# Allegro board PROIECT1DCE1.brd
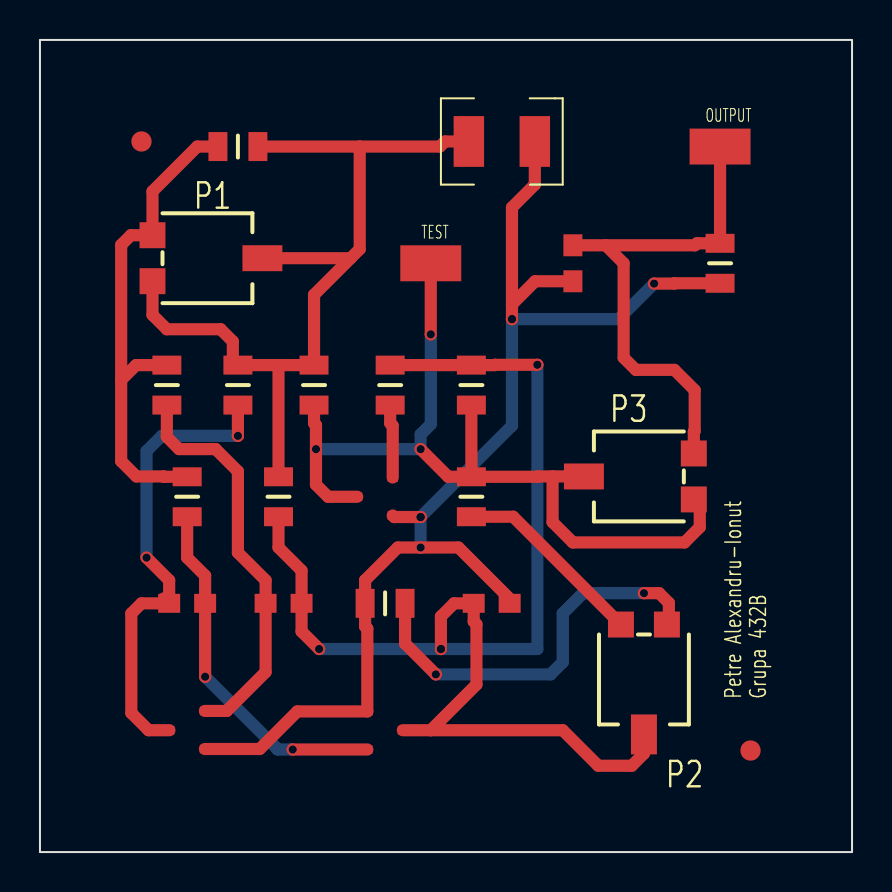
[diagram p0: board, top side]
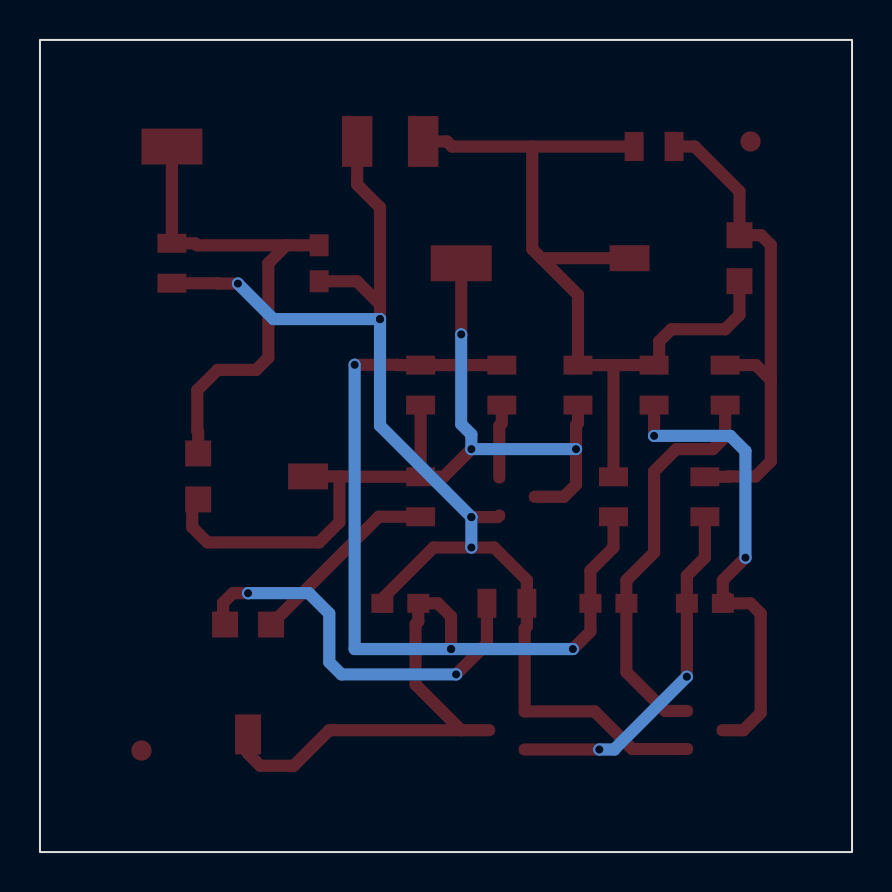
[diagram p1: board, bottom side, seen from below]

Outline 40.64 x 40.64 mm; copper layers: TOP, BOTTOM. Coordinates in mm from the lower left corner of the outline.
Outline path: rectangle 0,0 40.64,40.64

## Placement (name value [footprint] x y rotation side)
C1  470n  [CAPC2008X126N_0805]  7.37 12.45 0 top
C2  470n  [CAPC2008X126N_0805]  12.19 12.45 0 top
C3  1n  [CAPC2008X126N_0805]  22.61 12.45 180 top
C4  10n  [CAPC2008X126N_0805]  26.67 29.46 90 top
J1  CON1  [SMD_PAD_3-05_1-80]  34.04 35.31 0 top
J2  CON1  [SMD_PAD_3-05_1-80]  19.56 29.46 0 top
NOREF  -  [unnamed]  35.56 5.08 0 top
NOREF#2  -  [unnamed]  5.08 35.56 0 top
P1  50k  [3314G-1]  8.38 29.72 90 top
P2  100k  [3314G-1]  30.23 8.64 0 top
P3  500k  [3314G-1]  29.97 18.8 270 top
Q1  QMJD31C  [SOT23]  7.37 6.1 180 top
Q2  QMJD31C  [SOT23]  17.27 6.1 0 top
Q3  QMJD31C  [SOT23]  16.76 17.78 180 top
R1  2.2k  [RES2012X50N_0805]  9.91 23.37 90 top
R2  9.1k  [RES2012X50N_0805]  6.35 23.37 90 top
R3  9.1k  [RES2012X50N_0805]  7.37 17.78 90 top
R4  2.2k  [RES2012X50N_0805]  11.94 17.78 90 top
R5  47k  [RES2012X50N_0805]  9.91 35.31 0 top
R6  47k  [RES2012X50N_0805]  21.59 23.37 270 top
R7  9.1k  [RES2012X50N_0805]  17.53 23.37 270 top
R8  9.1k  [RES2012X50N_0805]  13.72 23.37 90 top
R9  100k  [RES2012X50N_0805]  21.59 17.78 90 top
R10  10k  [RES2012X50N_0805]  17.27 12.45 0 top
RL  1k  [RES2012X50N_0805]  34.04 29.46 90 top
V1  CON2  [1210RF_WV_12D]  23.11 35.56 0 top

## Library data of the parts
C1-C4 = C
J1 J2 = CON1
P1-P3 = POT
Q1-Q3 = QMJD31C
R1-R10 RL = R
V1 = CON2

## Footprints (pads in the part's own frame, mm; a bottom-side part is the same pattern mirrored in y, then rotated)
1210RF_WV_12D
  rect 1.524x2.54 smd: 1(-1.651,0) 2(1.651,0)
3314G-1
  rect 1.3x1.3 smd: 1(-1.15,2.75) 3(1.15,2.75)
  rect 1.3x2 smd: 2(0,-2.75)
CAPC2008X126N_0805
  rect 1.1x0.95 smd: 1(-0.9,0) 2(0.9,0)
RES2012X50N_0805
  rect 0.95x1.45 smd: 1(-1,0) 2(1,0)
SMD_PAD_3-05_1-80
  rect 3.05x1.8 smd: 1(0,0)
SOT23
  rect 0.508x0.432 smd: 1(-0.889,0.94) 2(-0.889,-0.965) 3(0.889,0)
unnamed
  round 1.016 smd: (0,0)

## Nets
0: C3.1 C4.1 Q1.1(E) Q2.1(E) Q3.1(E) R10.1 RL.1 V1.2
N35206: C1.2 Q2.2(B) R3.1
N35240: C2.1 Q1.2(B) R2.1
N35258: C1.1 Q1.3(C) R1.1
N35272: C2.2 C3.2 P2.2(T) Q2.3(C) R4.1 R6.1 R7.1
N35294: P1.1 P1.2(T) R1.2 R4.2 R5.2 R8.2 V1.1
N35362: P1.3(2) R2.2 R3.2 R5.1
N35472: J2.1 P3.2(T) P3.3(2) Q3.3(C) R6.2 R8.1 R9.2
N35578: P2.3(2) R10.2
N35640: P2.1 R9.1
N35692: C4.2 J1.1 P3.1 RL.2
N35976: Q3.2(B) R7.2

## Via types
v1: diameter 0.61, hole 0.406, TOP to BOTTOM, 19 vias

## Routing (per net, layer and track width the routed paths; a pad name or vN(x,y) marks a point on that pad's centre or on a via; arc(x,y) is an arc through that point)
0: length 63.6
  TOP w0.61: V1.2 24.77,33.4 23.62,32.26 23.62,27.41 ; 23.62,27.41 v1(23.62,26.67) ; 23.62,27.41 24.78,28.56 C4.1 ; Q3.1 17.73,16.76 v1(19.05,16.76) ; v1(30.73,28.45) 31.73,28.45 31.75,28.46 RL.1 ; C3.1 23.62,12.56 20.94,15.24 v1(19.05,15.24) 17.91,15.24 16.27,13.6 R10.1 16.27,11.29 16.38,11.18 Q2.1 12.88,7.04 11,5.16 8.26,5.16
  BOTTOM w0.61: v1(19.05,15.24) v1(19.05,16.76) 23.62,21.34 v1(23.62,26.67) 28.96,26.67 v1(30.73,28.45)
N35206: length 18
  TOP w0.61: R3.1 7.37,14.73 8.27,13.83 C1.2 v1(8.27,8.77) ; Q2.2 v1(12.65,5.13)
  BOTTOM w0.61: v1(8.27,8.77) 11.89,5.15 11.89,5.13 v1(12.65,5.13)
N35240: length 20.3
  TOP w0.61: R2.1 6.35,20.78 6.96,20.17 8.79,20.17 9.91,19.05 9.91,14.99 11.29,13.6 C2.1 11.29,9.01 9.35,7.06 8.26,7.06
N35258: length 24.2
  TOP w0.61: C1.1 6.21,12.7 ; C1.1 5.08,12.45 4.57,11.94 4.57,6.96 5.44,6.1 Q1.3 ; C1.1 6.47,13.6 v1(5.33,14.73) ; v1(9.91,20.83) R1.1
  BOTTOM w0.61: v1(5.33,14.73) 5.33,20.07 6.1,20.83 v1(9.91,20.83)
N35272: length 64.9
  TOP w0.61: 19.56,6.1 26.16,6.1 27.94,4.32 29.62,4.32 30.23,4.93 P2.2 ; 19.56,6.1 21.84,8.38 21.84,11.4 21.71,11.54 C3.2 20.72,12.45 20.07,11.79 v1(20.07,10.16) ; 19.56,6.1 Q2.3 ; R7.1 R6.1 22.75,24.37 22.76,24.38 v1(24.89,24.38) ; v1(13.97,10.16) 13.09,11.04 C2.2 13.09,14.09 11.94,15.24 R4.1
  BOTTOM w0.61: v1(13.97,10.16) v1(20.07,10.16) 24.89,10.16 v1(24.89,24.38)
N35294: length 43.9
  TOP w0.61: V1.1 20.27,35.56 20.02,35.31 16,35.31 ; R4.2 11.94,24.37 ; 11.94,24.37 R8.2 13.72,27.89 15.55,29.72 ; 11.94,24.37 R1.2 9.65,24.62 9.65,25.55 9.04,26.16 6.35,26.16 5.63,26.88 P1.1 ; 16,35.31 16,30.17 15.55,29.72 ; 16,35.31 R5.2 ; 15.55,29.72 P1.2
N35362: length 25.2
  TOP w0.61: R5.1 7.87,35.31 5.63,33.06 P1.3 4.55,30.87 4.06,30.38 4.06,23.62 ; 4.06,23.62 4.06,19.56 4.83,18.8 6.19,18.8 6.21,18.78 R3.2 ; 4.06,23.62 4.81,24.37 R2.2
N35472: length 45.3
  TOP w0.61: 25.65,18.8 25.65,16.51 26.67,15.49 32.26,15.49 33.02,16.26 33.02,17.35 P3.3 ; 25.65,18.8 P3.2 ; 25.65,18.8 24.92,18.8 24.91,18.78 R9.2 ; J2.1 v1(19.56,25.91) ; R9.2 R6.2 ; R9.2 20.43,18.78 v1(19.05,20.16) ; Q3.3 14.42,17.78 13.81,18.39 v1(13.81,20.16) 13.81,21.36 13.72,21.46 R8.1
  BOTTOM w0.61: v1(19.56,25.91) 19.56,21.41 19.05,20.9 v1(19.05,20.16) v1(13.81,20.16)
N35578: length 20.3
  TOP w0.61: R10.2 18.27,10.43 v1(19.81,8.89) ; P2.3 31.47,11.48 31.47,12.47 30.99,12.95 v1(30.23,12.95)
  BOTTOM w0.61: v1(30.23,12.95) 27.18,12.95 26.16,11.94 26.16,9.5 25.55,8.89 v1(19.81,8.89)
N35640: length 9.7
  TOP w0.61: R9.1 23.68,16.78 P2.1
N35692: length 25.7
  TOP w0.61: P3.1 32.72,21.03 32.77,21.07 32.77,23.11 31.75,24.13 29.82,24.13 29.21,24.74 29.21,29.46 28.31,30.36 ; 28.31,30.36 32.78,30.36 32.88,30.46 RL.2 J1.1 ; 28.31,30.36 C4.2
N35976: length 3.7
  TOP w0.61: Q3.2 17.65,21.33 17.53,21.46 R7.2

## Text on the board
Ref Des/Silkscreen Top: TEST | OUTPUT | Petre Alexandru-Ionut | Grupa 432B
XSECTION_CHART: *  SURFACE - AIR 0 MIL | L1: TOP CONDUCTOR - COPPER 0.72 MIL | *  DIELECTRIC - FR-4 58.56 MIL | L2: BOTTOM CONDUCTOR - COPPER 0.72 MIL | DESIGN CROSS SECTION CHART | ___________________________ | TOTAL THICKNESS 60 MIL | 1-2
COMPVAL_TYPE_TOP: FIGURE | SIZE | 16.0 | DRILL CHART: TOP to BOTTOM | ALL UNITS ARE IN MILS | PLATED | QTY | 19
